# EAGLE board out8_16A_mi_1_0 (EAGLE 5.04)
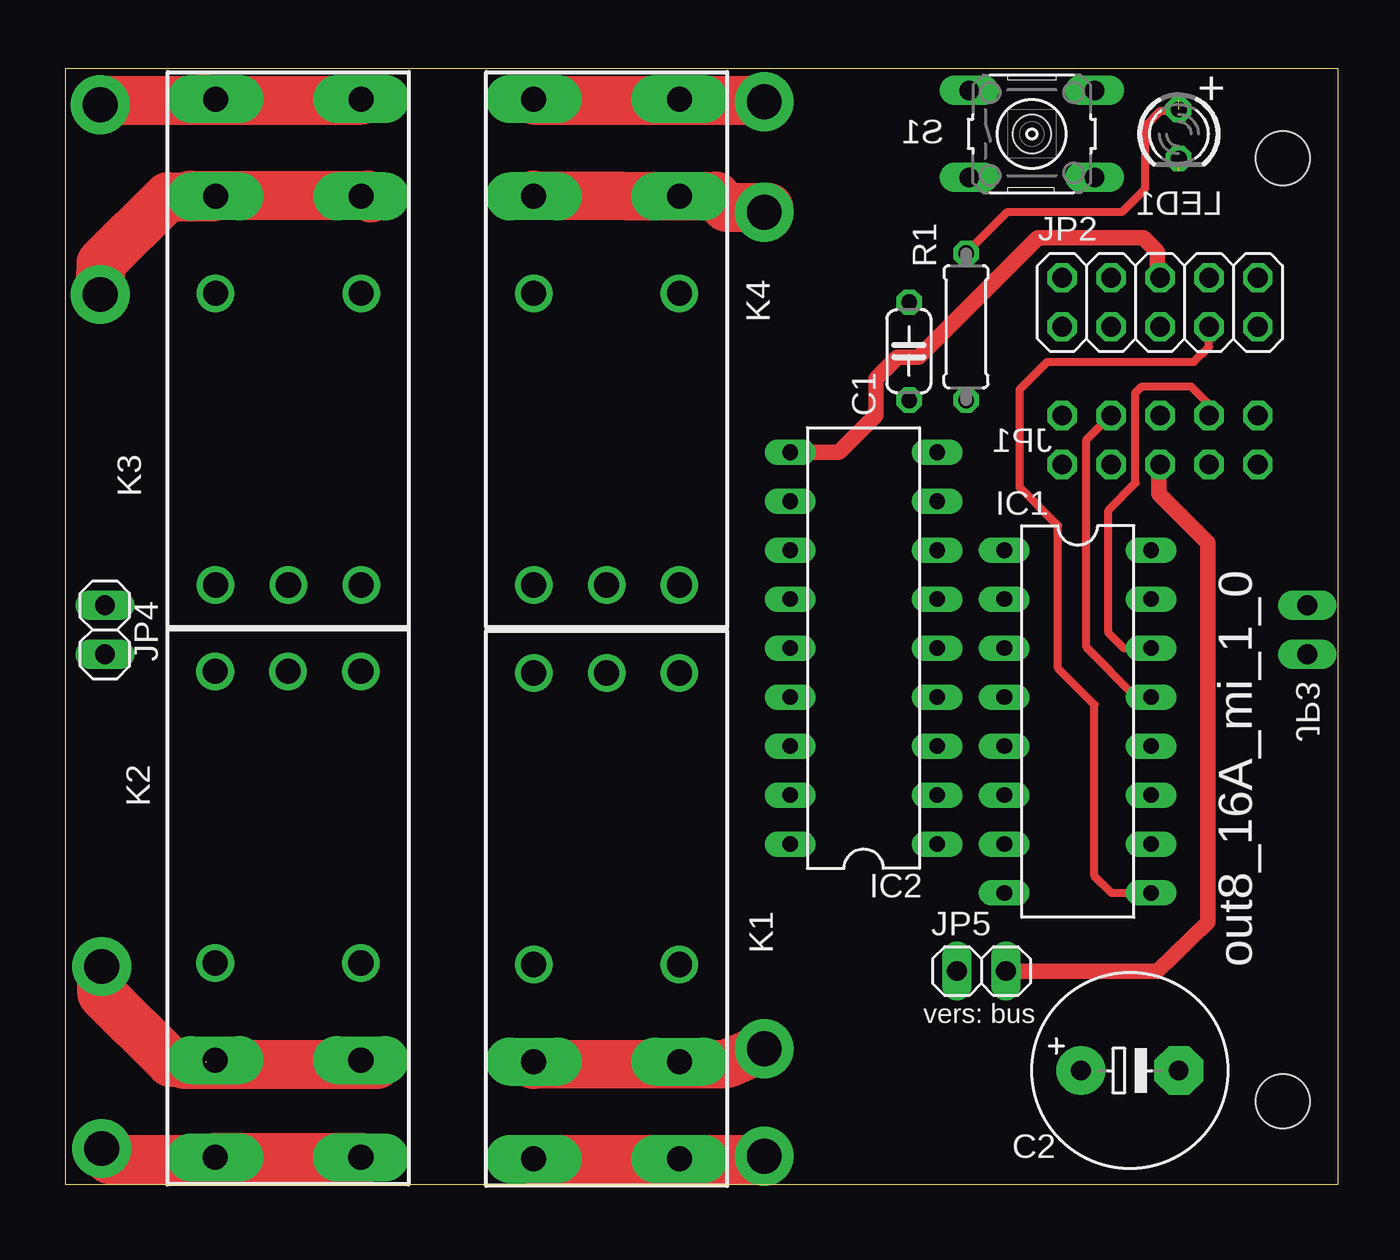
[diagram p0: board, top side]
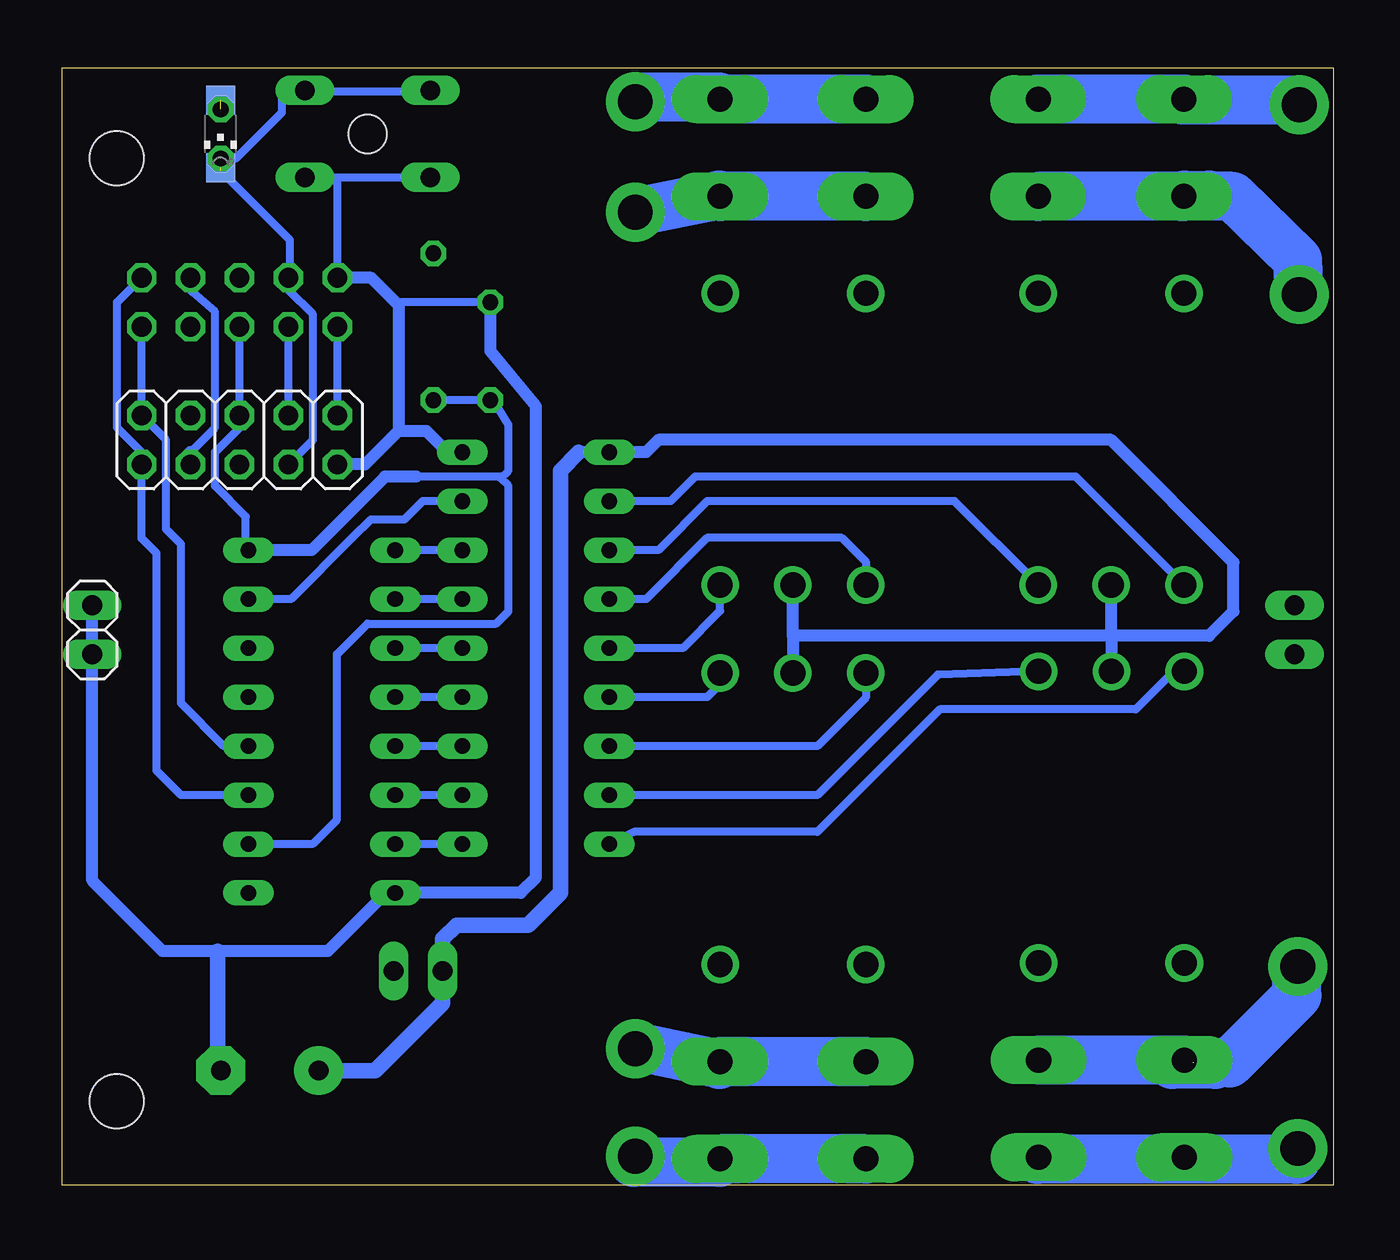
[diagram p1: board, bottom side, seen from below]

Size 66 x 57.9 mm. Coordinates in mm from the lower left corner, seen from the top.
Outline: 0,57.9 66,57.9 66,0 0,0 0,57.9
Copper layers (1*16): Top 0.035mm / dielectric 1.5mm / Bottom 0.035mm
Design rules "default": minimum track width 10mil, minimum drill 24mil, track to track 8mil, track to pad 8mil, pad to pad 8mil, via to via 8mil, smd to smd 8mil, copper to edge 40mil, drill to drill 8mil, minimum pad ring 10mil, minimum via ring 8mil, stop-mask expansion 4mil, vias tented up to drill 0mil, thermal gap 10mil
Holes 2.8 mm at 63.13,4.34 63.13,53.24
Holes 2 mm at 50.12,54.51
tKeepout: area 61.1,2.3 to 65.1,6.3; area 61.1,51.2 to 65.1,55.2
bKeepout: area 61.1,2.3 to 65.1,6.3; area 61.1,51.2 to 65.1,55.2; area 39,1.9 to 44,6.9

## Footprints (pad centres in the part's own frame; a part is rotated, then mirrored left to right if it is on the bottom)
C050-024X044 = drill 0.813 octagon: 1 -2.54,0; 2 2.54,0
E5-10,5 = drill 1.016 pad 2.54 round: + -2.54,0 | drill 1.016 pad 2.54 octagon: - 2.54,0
DIL16 = drill 0.813 long: 1 -8.89,-3.81; 2 -6.35,-3.81; 3 -3.81,-3.81; 4 -1.27,-3.81; 5 1.27,-3.81; 6 3.81,-3.81; 7 6.35,-3.81; 8 8.89,-3.81; 9 8.89,3.81; 10 6.35,3.81; 11 3.81,3.81; 12 1.27,3.81; 13 -1.27,3.81; 14 -3.81,3.81; 15 -6.35,3.81; 16 -8.89,3.81
DIL18 = drill 0.813 long: 1 -10.16,-3.81; 2 -7.62,-3.81; 3 -5.08,-3.81; 4 -2.54,-3.81; 5 0,-3.81; 6 2.54,-3.81; 7 5.08,-3.81; 8 7.62,-3.81; 9 10.16,-3.81; 10 10.16,3.81; 11 7.62,3.81; 12 5.08,3.81; 13 2.54,3.81; 14 0,3.81; 15 -2.54,3.81; 16 -5.08,3.81; 17 -7.62,3.81; 18 -10.16,3.81
2X05 = drill 1.016 octagon: 1 -5.08,-1.27; 2 -5.08,1.27; 3 -2.54,-1.27; 4 -2.54,1.27; 5 0,-1.27; 6 0,1.27; 7 2.54,-1.27; 8 2.54,1.27; 9 5.08,-1.27; 10 5.08,1.27
1X02 = drill 1.016 long: 1 -1.27,0; 2 1.27,0
RT1-BI = drill 1.3 pad 2.5 long: 11A 7.56,3.78; 11B 7.56,-3.78; 14A 12.6,3.78; 14B 12.6,-3.78 | drill 1.3 round: 12A 2.52,3.78; 12B 2.52,-3.78; A1 -12.6,-3.78; A2 -12.6,3.78; A3 -12.6,0
LED3MM = drill 0.813 octagon: A -1.27,0; K 1.27,0
CHIPLED_1206 = smd 1.5 x 1.5: A 0,-1.75; C 0,1.75
0207/7 = drill 0.813 octagon: 1 -3.81,0; 2 3.81,0
B3F-10XX = drill 1.016 long: 1 -3.251,2.261; 2 3.251,2.261; 3 -3.251,-2.261; 4 3.251,-2.261

## Placement (x,y rotation side)
C1  100nF  [C050-024X044]  43.74,43.24 90 top
C2  220µ/35V  [E5-10,5]  55.2,5.93 0 top
IC1  74HC595N  [DIL16]  52.5,24.03 270 top
IC2  ULN2803  [DIL18]  41.39,27.84 90 top
JP1  [2X05]  56.76,38.63 180 bottom
JP2  [2X05]  56.76,45.78 0 top
JP3  [1X02]  64.41,28.79 90 bottom
JP4  [1X02]  2.02,28.79 90 top
JP5  [1X02]  47.5,11.09 0 top
K1  RT314F24  [RT1-BI]  28.05,13.95 270 top
K2  RT314F24  [RT1-BI]  11.52,14.03 270 top
K3  RT314F24  [RT1-BI]  11.54,43.71 90 top
K4  RT314F24  [RT1-BI]  28.05,43.71 90 top
LED1  [LED3MM]  57.74,54.51 270 top
LED2  [CHIPLED_1206]  57.75,54.51 180 bottom
R1  1k  [0207/7]  46.7,44.51 270 top
S1  [B3F-10XX]  50.12,54.51 0 top

## Library data of the parts
C1 C2 R1 = rcl
IC1 = 74xx-eu
IC2 = uln-udn
JP1-JP5 = pinhead
K1-K4 = relay
LED1 LED2 = led
S1 = switch-omron

## Nets
CTRL: IC1.13 JP1.3 JP2.3
EIB+: JP1.1 JP2.1
GND: C1.2 C2.- IC1.8 IC2.9 JP1.2 JP2.2 JP3.1 JP3.2 S1.3 S1.4
IO0: IC1.14 JP1.7
IO1: JP1.8 JP2.8
IO2: IC1.12 JP1.9 JP2.9
IO3: IC1.11 JP1.10 JP2.10
N$1: K1.14A K1.14B
N$2: K1.11A K1.11B
N$11: K2.14A K2.14B
N$12: K2.11A K2.11B
N$18: K3.14A K3.14B
N$19: K3.11A K3.11B
N$20: K4.14A K4.14B
N$21: K4.11A K4.11B
N$30: LED1.A LED2.A R1.1
N$38: IC1.9 JP2.7
O1: IC2.18 K2.A1
O2: IC2.17 K2.A2
O3: IC2.16 K1.A1
O4: IC2.15 K1.A2
O5: IC2.14 K4.A1
O6: IC2.13 K4.A2
O7: IC2.12 K3.A1
O8: IC2.11 K3.A2
PARSEROUT0: IC1.7 IC2.1
PARSEROUT1: IC1.6 IC2.2
PARSEROUT2: IC1.5 IC2.3
PARSEROUT3: IC1.4 IC2.4
PARSEROUT4: IC1.3 IC2.5
PARSEROUT5: IC1.2 IC2.6
PARSEROUT6: IC1.1 IC2.7
PARSEROUT7: IC1.15 IC2.8
PROG: JP1.4 JP2.4 LED1.K LED2.C S1.1 S1.2
VCC: C1.1 IC1.10 IC1.16 JP1.5 JP2.5 R1.2
VERS: C2.+ IC2.10 JP2.6 JP5.1 K1.A3 K2.A3 K3.A3 K4.A3
VERS_CONTR: JP1.6 JP5.2

## Tracks (layer width: path | path; a pad name or v marks a point on that pad's centre or on a via)
CTRL
  Top 0.406: IC1.13 55.51,25.3 52.95,27.89 52.95,38.65 JP1.3
  Bottom 0.406: JP1.3 JP2.3
EIB+
  Bottom 0.406: JP1.1 JP2.1
GND
  Bottom 0.406: 52,52.25 S1.3 | 52,52.25 S1.4 | JP2.2 51.68,51.93 52,52.25 | C1.2 48.35,45.78 48.51,45.62
  Bottom 0.61: IC1.8 42.18,15.14 41.39,15.93 41.39,40.38 43.74,43.24 C1.2 | IC1.8 | JP1.2 50.25,37.36 48.51,39.11 | IC1.8 49.16,15.14 52.18,12.12 57.9,12.12 60.75,12.12 64.4,15.77 JP3.1 JP3.2 | 48.51,39.11 48.51,45.62 49.93,47.05 JP2.2 | IC2.9 45.97,38 47.08,39.11 48.51,39.11
  Bottom 0.813: C2.- 57.9,5.93 57.9,12.12
IO0
  Top 0.406: IC1.14 54.88,27.84 54.09,28.63 54.09,34.98 55.49,36.41 55.49,41.09 55.83,41.41 58.37,41.41 59.25,40.54 59.25,39.96 JP1.7
IO1
  Bottom 0.406: 59.3,38 58.03,39.27 58.03,45.28 59.18,46.29 59.3,46.4 JP2.8
  Bottom 0.61: JP1.8 59.3,38
IO2
  Bottom 0.406: JP2.9 JP1.9 60.57,38.63 60.57,34 59.8,33.23 59.8,24.98 57.58,22.76 IC1.12 | IC1.12
IO3
  Bottom 0.406: JP2.10 63.11,45.78 63.11,39.27 61.84,38 JP1.10 61.84,33.53 61.07,32.76 61.07,21.49 59.8,20.22 IC1.11
N$1
  Bottom 2.54: K1.14B K1.14A
N$2
  Bottom 2.54: K1.11B K1.11A
N$3  (via drill 1.8 pad 3.05)
  other vias: 1.86,1.88
N$4  (via drill 1.8 pad 3.05)
  other vias: 1.86,11.33
N$5  (via drill 1.8 pad 3.05)
  other vias: 1.78,46.17
N$6  (via drill 1.8 pad 3.05)
  other vias: 1.78,56.02
N$7  (via drill 1.8 pad 3.05)
  other vias: 36.23,56.17
N$8  (via drill 1.8 pad 3.05)
  Bottom 2.54: 31.86,51.33 v36.24,50.44
N$9  (via drill 1.8 pad 3.05)
  other vias: 36.23,7.06
N$10  (via drill 1.8 pad 3.05)
  other vias: 36.23,1.48
N$11
  Top 2.54: K2.14B K2.14A
N$12
  Bottom 2.54: K2.11B K2.11A
N$18
  Bottom 2.54: K3.14A K3.14B
N$19
  Bottom 2.54: K3.11A K3.11B
N$20
  Bottom 2.54: K4.14A K4.14B
N$21
  Bottom 2.54: K4.11A K4.11B
N$22
  Bottom 2.54: 31.86,6.25 36.31,7.19
N$23
  Bottom 2.54: 31.86,1.17 36.31,1.17
N$24
  Bottom 2.54: 15.35,1.33 1.94,1.33 1.94,2.12
N$25
  Bottom 2.54: 6.14,6.25 8.37,6.25
N$26
  Bottom 2.54: 7.73,51.33 6.46,51.33
N$27
  Bottom 2.54: 7.81,6.33 5.39,6.33 1.9,9.82 1.9,11.41
N$28
  Bottom 2.54: 31.86,56.41 36.31,56.41
N$29
  Top 2.54: 7.1,56.33 7.73,56.25 7.81,56.25 | 7.81,56.25 15.35,56.25 | 7.81,56.25 1.94,56.25 1.62,55.94
N$30  (1 unrouted)
  Top 0.406: R1.1 48.85,50.46 54.8,50.46 55.99,51.65 55.99,54.9 56.78,55.7 57.66,55.7 LED1.A
N$31
  Top 2.54: 24.24,56.25 36.15,56.25 36.31,56.41
N$32
  Top 2.54: 24.24,51.33 33.7,51.28 34.28,50.7 36.46,50.7
N$33
  Top 2.54: 6.46,51.33 15.67,51.33 15.83,51.17
N$34
  Bottom 2.54: 7.89,51.26 5.25,51.26 1.86,47.96 1.78,46.17
N$35
  Top 2.54: 6.14,6.25 16.14,6.25
N$36
  Top 2.54: 24.24,6.25 34.31,6.29 36.24,7.14
N$37
  Top 2.54: 24.16,1.33 36.07,1.33
N$38
  Top 0.406: JP2.7 59.3,43.45 58.53,42.68 50.91,42.68 49.48,41.25 49.48,36.17 51.47,34.19 51.47,26.8 53.37,24.9 53.37,16.01 54.24,15.14 IC1.9 | IC1.9
N$39
  Bottom 2.54: 7.81,56.25 2.18,56.25 1.86,55.94
N$40
  Top 2.54: 7.73,51.25 5.29,51.25 1.83,47.82 1.78,46.17
N$41  (1 unrouted)
  Top 0.406: 7.25,6.09 7.25,6.37 7.31,6.43 7.32,6.43 7.36,6.39 7.4,6.39 7.4,6.34 7.36,6.3
  Top 2.54: 1.86,11.25 1.86,9.91 5.42,6.35 7.31,6.35
N$42
  Top 2.54: 15.27,1.25 15.19,1.33 2.25,1.33 1.62,1.96
O1
  Bottom 0.406: K2.A1 8.47,26.47 10.27,24.66 20.43,24.66 26.78,18.31 36.31,18.31 IC2.18
O2
  Bottom 0.406: K2.A2 20.53,26.47 26.78,20.22 IC2.17
O3
  Bottom 0.406: K1.A1 24.27,25.27 26.78,22.76 IC2.16
O4
  Bottom 0.406: K1.A2 31.83,25.96 32.5,25.3 IC2.15
O5
  Bottom 0.406: K4.A1 31.83,29.77 33.77,27.84 IC2.14
O6
  Bottom 0.406: IC2.13 35.67,30.38 32.5,33.55 25.51,33.55 24.24,32.28 24.24,31.14 K4.A2
O7
  Bottom 0.406: IC2.12 35.04,32.92 32.5,35.46 19.67,35.46 K3.A1
O8
  Bottom 0.406: IC2.11 34.4,35.46 33.13,36.73 13.38,36.73 K3.A2
PARSEROUT0
  Bottom 0.406: IC2.1 IC1.7 | IC1.7
PARSEROUT1
  Bottom 0.406: IC1.6 47.42,20.22 45.99,20.22 IC2.2
PARSEROUT2
  Bottom 0.406: IC1.5 47.42,22.76 45.99,22.76 IC2.3
PARSEROUT3
  Bottom 0.406: IC2.4 IC1.4 | IC1.4
PARSEROUT4
  Bottom 0.406: IC1.3 47.42,27.84 45.99,27.84 IC2.5
PARSEROUT5
  Bottom 0.406: IC1.2 47.42,30.38 45.99,30.38 IC2.6
PARSEROUT6
  Bottom 0.406: IC1.1 47.42,32.92 45.99,32.92 IC2.7
PARSEROUT7
  Bottom 0.406: IC2.8 47.26,35.46 48.21,34.5 49.96,34.5 50.91,33.55 54.09,30.38 IC1.15 | IC1.15
PROG  (1 unrouted)
  Bottom 0.406: JP1.4 52.95,38.63 52.95,45.14 54.22,46.41 JP2.4 54.14,47.13 54.14,49 57.74,52.6 57.74,53.16 57.7,53.2 LED1.K 56.94,53.24 54.56,55.62 54.56,56.69 S1.2 53.01,56.77 52.97,56.73 48.17,56.73 S1.1
VCC
  Bottom 0.406: JP2.5 JP1.5 56.76,39.27 58.03,38 58.03,36.25 56.44,34.66 56.44,32.92 IC1.16 | 43.21,36.65 42.82,36.25 42.82,29.74 43.45,29.11 50.12,29.11 51.71,27.52 51.71,18.95 52.97,17.68 IC1.10 | 43.21,36.65 43.29,36.73 47.58,36.73 | 43.21,36.65 42.82,37.04 42.82,39.43 43.59,40.7 C1.1 46.07,40.7 R1.2
  Bottom 0.61: IC1.16 53.03,32.92 49.22,36.73 47.58,36.73 | IC1.16 | IC1.10
VERS
  Top 0.813: JP2.6 56.63,47.18 56.63,48.39 55.91,49.11 50.43,49.11 44.24,42.92 43.13,42.92 42.02,41.81 42.02,39.9 40.12,38 IC2.10
  Bottom 0.61: 28.05,28.47 K4.A3 | 28.05,28.47 K1.A3 | 11.54,28.47 K3.A3 | 11.54,28.47 28.05,28.47 | 11.54,28.47 K2.A3 | 11.54,28.47 6.46,28.47 5.19,29.74 5.19,32.28 11.54,38.63 35.04,38.63 35.67,38 IC2.10 39.16,38
  Bottom 0.813: 39.16,38 40.12,37.04 40.12,15.14 41.78,13.47 45.51,13.47 46.23,12.76 JP5.1 | JP5.1 | JP5.1 46.23,9.42 49.72,5.93 C2.+
VERS_CONTR
  Top 0.813: JP1.6 56.71,37.31 56.71,35.85 59.25,33.31 59.25,13.63 56.63,11.09 JP5.2

## Text on the board
tPlace: + | out8_16A_mi_1_0 | vers: bus